# Altium PCB PCB print.PcbDoc
Units mil, origin at the board's own origin, x right, y up, seen from the top; angles counter-clockwise.
Board outline 3350 x 2755 mil, 2 copper layers (Top Layer, Bottom Layer); 22 components, 24 nets, 114 pads, 4 vias.
Unrouted connection lines stored in the file: 1.
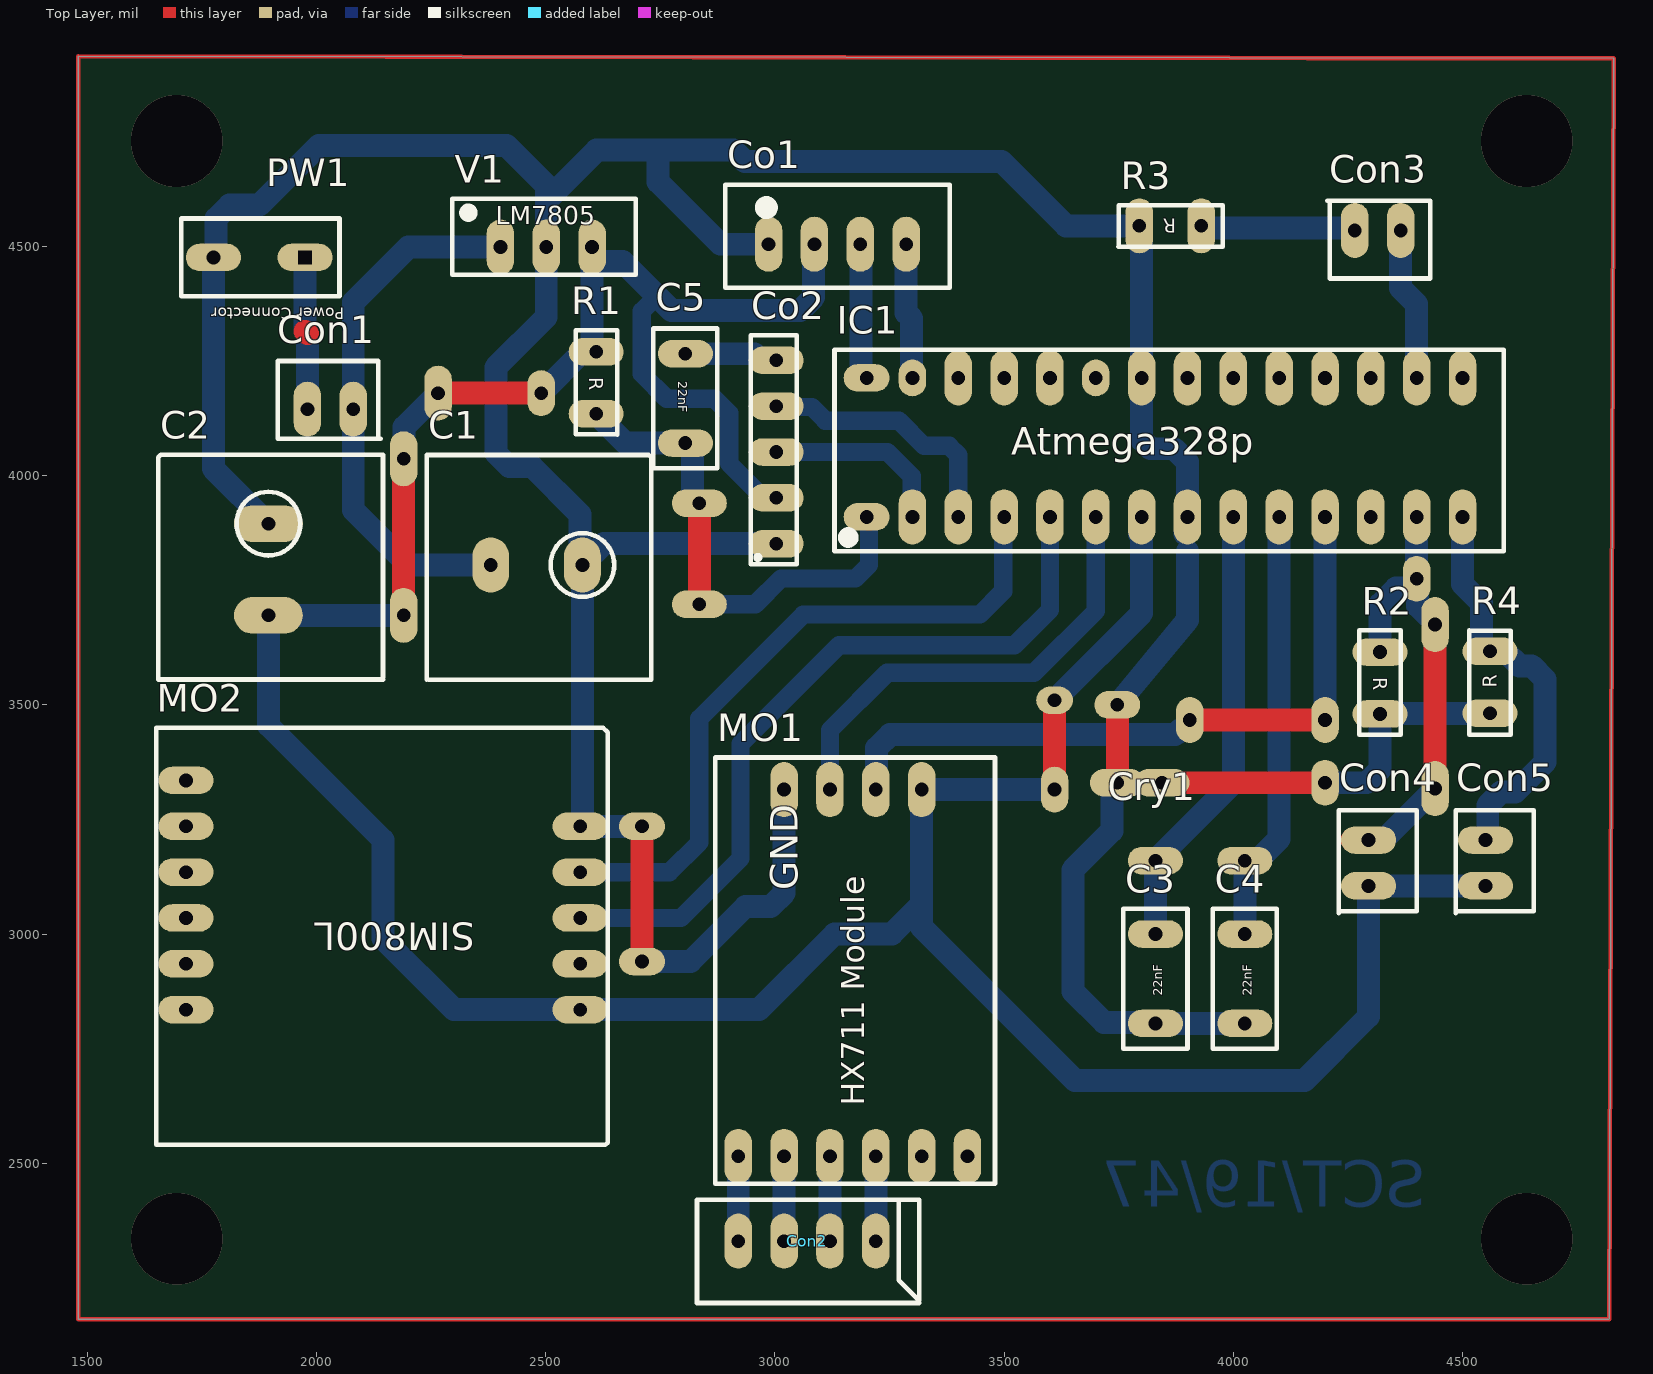
[diagram p0: Top Layer view]
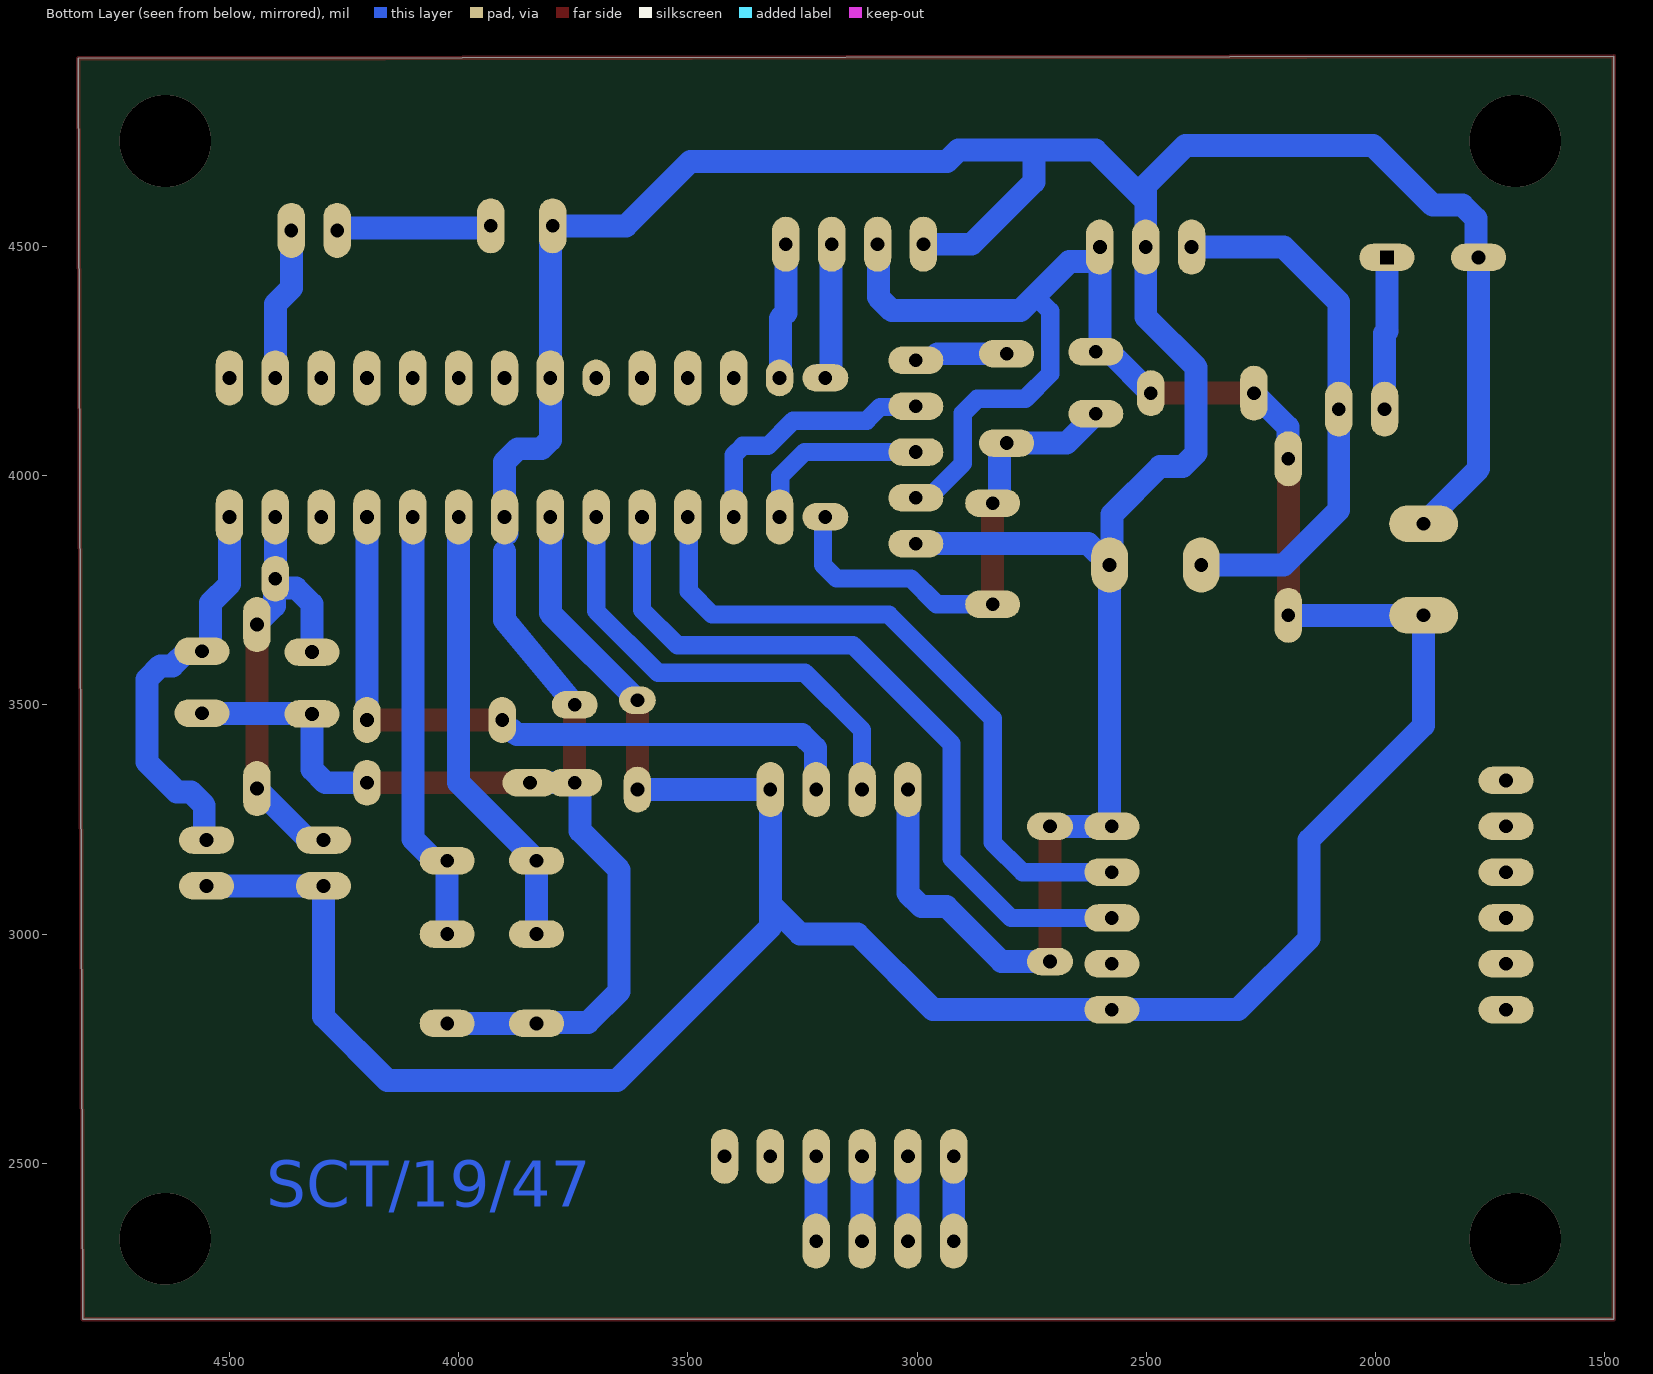
[diagram p1: Bottom Layer view, seen from below]
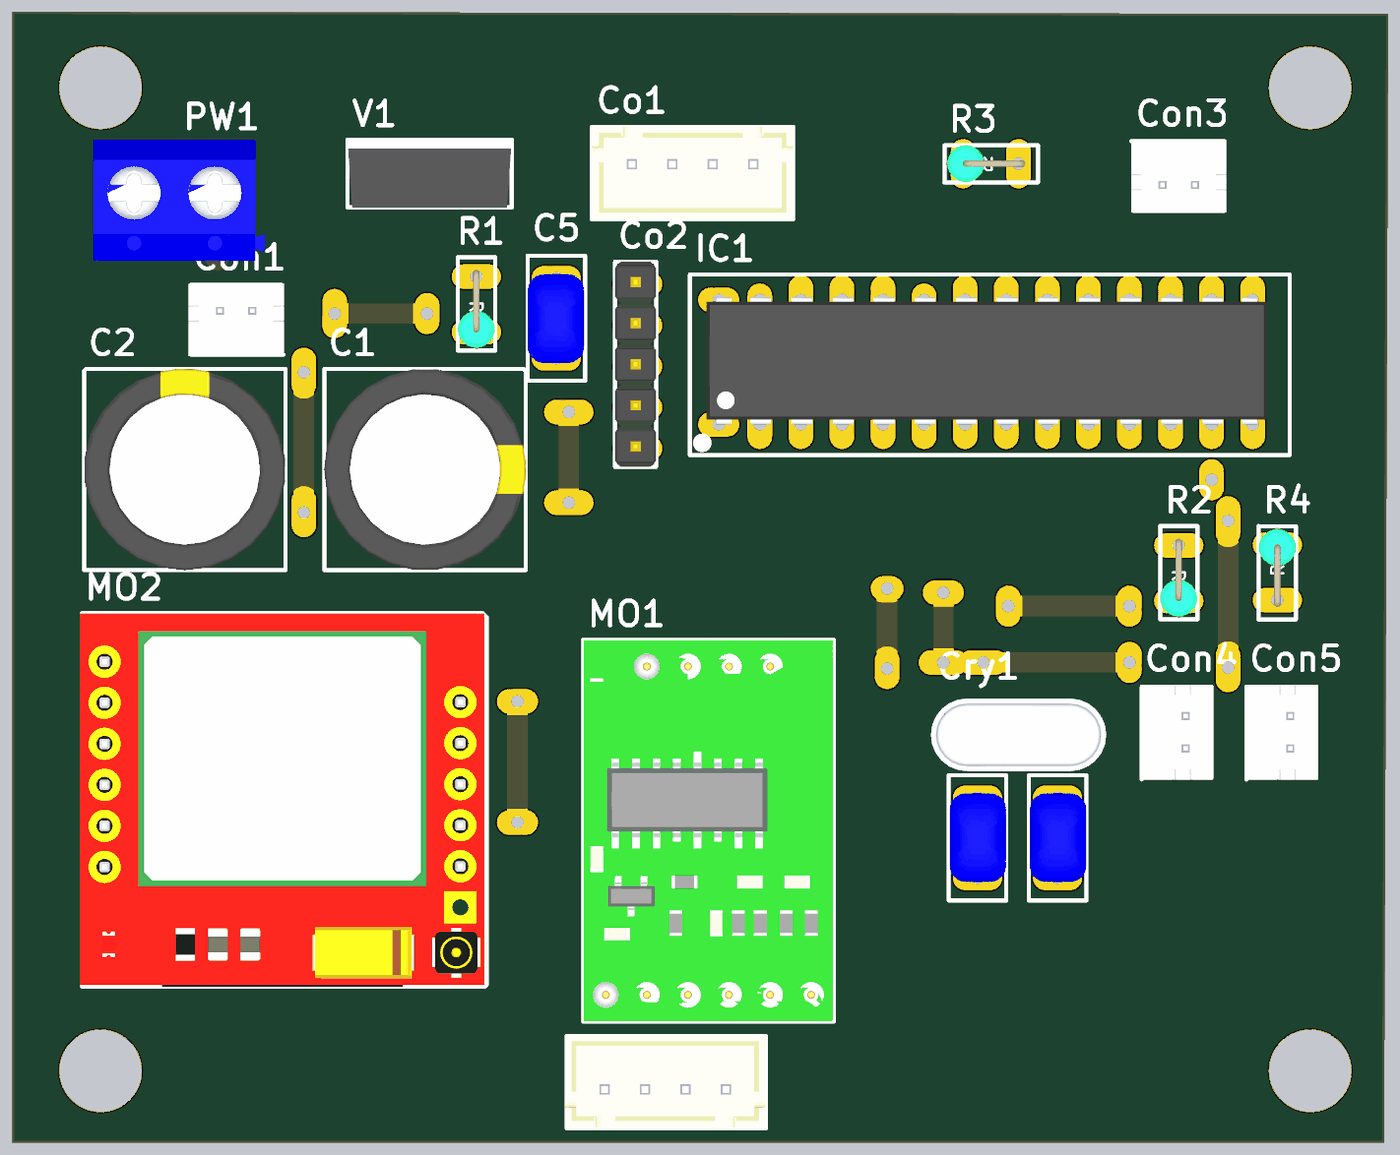
[diagram p2: 3D render of the assembled board from above, using the file's embedded part models]

## Layer stack, top to bottom
Top Solder: solder mask 0.4, Solder Resist, Dk 3.5
Top Layer: signal copper 1.4
Dielectric 1: dielectric 12.6, FR-4, Dk 4.8
Bottom Layer: signal copper 1.4
Bottom Solder: solder mask 0.4, Solder Resist, Dk 3.5

## Board outline
1480,2160 1480,4915 4830,4910 4820,2160

## Design rules (kind name [scope] priority, off if disabled: settings)
Clearance [All] p1: gap=10 ignorepadtopadclearanceinfootprint=FALSE except(0: Arc-Hole Track-Hole SMDPad-Hole THPad-Hole Via-Hole Fill-Hole Poly-Hole Region-Hole Text-Hole)
PolygonConnect [All] p1: connectstyle=Relief reliefconductorwidth=10 reliefentries=4 polygonreliefangle="90 Angle" airgapwidth=10
RoutingVias [All] p1: holewidth=28 width=50 viastyle="Through Hole" minholewidth=28 minwidth=50 maxholewidth=28 maxwidth=50
SolderMaskExpansion [All] p1: expansion=4
Width [All] p1: maxlimit=60 minlimit=30 preferedwidth=50 minimp=50.000000 maximp=50.000000 favimp=50.000000
30 further rules are at their usual default settings.

## Components (designator, comment, footprint, x,y, rotation, side; value= is the part's Value field where it differs from the comment)
C1 "100uF" "100uF Capacitor"#1 2380,3805 r0 top
C2 "100uF" "100uF Capacitor"#2 1895,3695.16 r90 top
C3 "22nF" "22nF capacitor" 3830,2805 r90 top
C4 "22nF" "22nF capacitor" 4025,2805 r90 top
C5 "100nF" "22nF capacitor" 2804.57,4265.93 r270 top
Co1 "OLED I2C connector" "oled connector i2c" 2986.17,4504.82 r0 top
Co2 "FTDI" FTDI 3002.65,3851.48 r90 top
Con1 "2 pin connector" "2 pin  connector" 2080,4145 r180 top
Con2 "4 pin connector" "4 pin connector" 3220,2330 r180 top
Con3 "indicator light" "2 pin  connector" 4265,4535 r0 top
Con4 "switch connector" "2 pin  connector" 4295,3105 r90 top
Con5 "switch connector" "2 pin  connector" 4550,3105 r90 top
Cry1 "16mhz" "16mhz crystal" 4025,3160 r180 top (schematic designator Cry?)
IC1 "Atmega328p" "Atmega328 TH" 3200,3910 r90 top
MO1 "HX711 Module" "HX711 MODULE" 2920,2515 r90 top
MO2 "SIM800l  GSM Module" "sim800l module" 2575,2835 r180 top
PW1 "Power_connector" Power_connector 1975,4475.95 r180 top
R1 "10k" "Resistor Vertical" 2610,4270 r270 top
R2 "10k" "Resistor Vertical" 4320,3615 r270 top
R3 "220" "Resistor Vertical" 3930,4545 r180 top
R4 "10k" "Resistor Vertical" 4560,3481.75 r90 top
V1 "LM7805CT" LM7805CT 2401.13,4498.59 r0 top

## Footprints (in the part's own frame and the unit in brackets; to place one, negate y for a bottom-side part, rotate by r counter-clockwise, add the part's x,y. Pads: shape width x height; smd on the part's side, far side on the other; paste and mask are expansions set on the pad)
"2 pin  connector" [mil]
  oval 60x120 hole 30: 1(0,0) 2(100,0)
  silkscreen extent -60,-105 165,65, body extent -61,-109 171,69, height 236
"4 pin connector" [mil]
  oval 60x120 hole 30: 1(0,0) 2(100,0) 3(200,0) 4(300,0)
  silkscreen extent -95,-90 390,135, body extent -94,-93 394,133, height 276
"16mhz crystal" [mil]
  oval 120x60 hole 30: 1(0,0) 2(195,0)
  body extent -119,-82 309,95, height 145
"22nF capacitor" [mil]
  oval 60x120 hole 30: 1(0,0) 2(195,0)
  silkscreen extent -55,-70 250,70, body extent -10,-70 207,68, height 218
"100uF Capacitor"#1 [mil]
  oval 80x120 hole 30: 1(0,0) 2(200,0)
  silkscreen extent -140,-250 350,240, body extent -141,-251 350,241, height 984
"100uF Capacitor"#2 [mil]
  oval 80x150 hole 30: 1(0,0) 2(200,0)
  silkscreen extent -140,-250 350,240, body extent -141,-251 350,241, height 984
"Atmega328 TH" [mil]
  oval 60x100 hole 30: 1(0,0) 28(303.14,0)
  oval 120x60 hole 30: 2(0,-100) 3(0,-200) 4(0,-300) 5(0,-400) 6(0,-500) 7(0,-600) 8(0,-700) 9(0,-800) 10(0,-900) 11(0,-1000) 12(0,-1100) 13(0,-1200) 14(0,-1300) 15(303.14,-1300) 16(303.14,-1200) 17(303.14,-1100) 18(303.14,-1000) 19(303.14,-900) 20(303.14,-800) 21(303.14,-700) 22(303.14,-600) 24(303.14,-400) 25(303.14,-300) 26(303.14,-200)
  oval 80x60 hole 30: 23(303.14,-500) 27(303.14,-100)
  silkscreen extent -75,-1390 365,70, body extent -1,-1335 311,30, height 180
FTDI [mil]
  oval 60x120 hole 30: 1(0,0) 2(100,0) 3(200,0) 4(300,0) 5(400,0)
  silkscreen extent -45,-45 455,55, body extent -45,-45 455,55, height 374
"HX711 MODULE" [mil]
  oval 120x60 hole 30: 1(0,0) 2(0,-100) 3(0,-200) 4(0,-300) 5(0,-400) 6(0,-500) 7(800,-100) 8(800,-200) 9(800,-300) 10(800,-400)
  silkscreen extent -60,-560 870,50, body extent -60,-558 870,48, height 409
LM7805CT [mil]
  oval 60x120 hole 30: 1(0,0) 2(100,0) 3(200,0)
  silkscreen extent -105,-60 295,105, body extent -105,-60 295,105, height 900
"oled connector i2c" [mil]
  oval 60x120 hole 30: 1(0,0) 2(100,0) 3(200,0) 4(300,0)
  silkscreen extent -95,-95 395,130, body extent -94,-95 394,131, height 276
Power_connector [mil]
  oval 120x60 hole 30 square: 1(0,0)
  oval 120x60 hole 30: 2(200,0)
  silkscreen extent -75,-85 270,85, body extent -120,-128 297,168, height 394
"Resistor Vertical" [mil]
  oval 60x120 hole 30: 1(0,0) 2(135,0)
  silkscreen extent -47,-45 181,46, body extent -17,-46 177,45, height 501
"sim800l module" [mil]
  oval 120x60 hole 30: 1(0,0) 2(0,-100) 3(0,-200) 4(0,-300) 5(0,-400) 6(860,-500) 7(860,-400) 8(860,-300) 9(860,-200) 10(860,-100) 11(860,0)
  silkscreen extent -60,-615 925,295, body extent -55,-615 929,295, height 238

## Part data
C1 C2: library part "100uF Capacitor"
C3 C4 C5: library part "22nF Capacitor"
Con3 Con4 Con5: library part "2 pin connector"
Cry1: library part "16mhz crystal"
R1 R2 R3 R4: library part "Resistor vertical"

## Free pads (board coordinates)
  oval 120x60 hole 30: 9(2835,3940) 10(2835,3719.29) 16(3844.29,3330) 18(3746.91,3330)
  oval 60x100 hole 30: 11(4200,3466.99) 12(3905,3466.99) 15(4200,3330) 20(3610,3315) 24(2489.92,4179.92) 27(4400,3775)
  oval 100x60 hole 30: 13(2710,3235) 14(2710,2940) 17(3746.91,3500)
  oval 80x60 hole 30: 19(3610,3510)
  oval 60x120 hole 30: 21(2190,3695.16) 22(2190,4036.74) 23(2265,4179.92) 28(4440,3675) 29(4440,3317.29)

## Via types
v1: diameter 200, hole 200, Top Layer to Bottom Layer, 4 vias

## Nets (pads, with @x,y where several pads share a name; then routed paths per layer and width w, separated by ;. In a path a pad name is that pad's centre, name@x,y a point inside that pad or via, vN(x,y) a via of type N, cw(c..) or ccw(c..) an arc to the next point about the centre after c; other vN are vias at no path point)
GND: C1.2 C2.2 C3.1 C4.1 Co1.1 Co2.1 IC1.8 IC1.22 MO1.7 MO2.5 pad.13 pad.14 pad.15 pad.16 pad.17 pad.18 PW1.2 R2.2 R3.2 R4.1 V1.2 | length 9463.7
  Top Layer w50: pad.14 pad.13 ; pad.18 pad.17 ; pad.16@3842.38,3331.91 pad.16 pad.15
  Bottom Layer w50: C2.2 1775,4015.16 PW1.2 1776.09,4475.95 1780.71,4480.57 1780.71,4560.71 1810,4590 1875,4590 2005,4720 2414.72,4720 2501.13,4633.59 2501.13,4600 ; MO2.5 MO2.5@2580,3235 ; C1.2@2605.74,3830.74 2626.48,3851.48 Co2.1 ; pad.14 2815.9,2940 2935.9,3060 2990.71,3060 3020,3089.29 MO1.7 ; pad.13 MO2.5@2580,3235 ; Co1.1 2881.17,4504.82 2745,4640.99 2745,4710 ; pad.17 3900,3685 3900,3835 ; pad.16 pad.18 3739.62,3330 3735,3325.38 3735,3225 3650,3140 3650,2875 3718.09,2806.91 3828.09,2806.91 C3.1 C4.1 C4.1@4026.91,2803.09 ; IC1.8@3895,3872.29 3900,3877.29 IC1.8 3900.38,3910.38 3900.38,4029.29 3871.09,4058.58 3819.56,4058.58 3800,4078.14 IC1.22 3800,4507.29 3795,4512.29 R3.2 3635,4545 3494.29,4685.71 2934.29,4685.71 2910,4710 2745,4710 ; pad.15 4290.71,3330 4320,3359.29 R2.2 4320.88,3480.88 4559.12,3480.88 R4.1 ; 2501.13,4600 V1.2 2501.13,4346.13 2391.13,4236.13 2391.13,4049.29 2420.42,4020 2470,4020 2574.26,3915.74 2574.26,3810.74 C1.2 MO2.5@2580,3235 ; 2501.13,4600 2611.13,4710 2745,4710
NetC1_1: C1.1 Con1.1 V1.1 | length 1174.1
  Bottom Layer w50: C1.1 2200,3805 2080,3925 Con1.1 2080,4378.59 2200,4498.59 V1.1
NetC2_1: C2.1 Co1.2 Co2.2 Con4.1 Con5.1 IC1.7 MO1.10 MO2.1 pad.19 pad.20 pad.21 pad.22 pad.23 pad.24 R1.1 V1.3 | length 7870.7
  Top Layer w50: pad.21 pad.22 pad.22@2190.75,4037.5 ; pad.23 pad.24 ; R1.1@2580,4270 R1.1 ; pad.20 pad.19
  Bottom Layer w40: 2742.42,4392.14 2709.57,4359.29 2709.57,4221.95 2763.86,4167.66 2868.51,4167.66 2900.03,4136.14 2900.03,4026.81 Co2.2@2975.36,3951.48
  Bottom Layer w50: pad.21 C2.1 1895,3455 2145,3205 2145,2990 2300,2835 MO2.1 2965,2835 3130,3000 3255,3000 3320,3065 ; pad.22 2190.75,4037.5 2190.75,4105.67 pad.23 ; pad.24 R1.1@2580,4270 ; V1.3 V1.3@2601.13,4471.29 ; R1.1 2605.75,4270 2601.13,4274.62 V1.3@2601.13,4471.29 ; Co2.2@2975.36,3951.48 Co2.2 Co2.2@3000.74,3953.39 ; Co1.2 3084.26,4502.91 3084.26,4389.29 3054.97,4360 2774.56,4360 2742.42,4392.14 2667.89,4466.67 2605.75,4466.67 V1.3@2601.13,4471.29 ; pad.20 MO1.10 3320,3065 ; pad.19 3800,3700 IC1.7@3800,3877.29 ; IC1.7@3795,3872.29 IC1.7@3800,3877.29 ; IC1.7@3801.91,3911.91 IC1.7 IC1.7@3800,3877.29 ; Con5.1 Con4.1 4295,2820 4155,2680 3655,2680 3320,3015 3320,3065
NetC3_2: C3.2 Cry1.2 IC1.9 | length 980.4
  Bottom Layer w50: C3.2 Cry1.2 4000,3330 IC1.9
NetC4_2: C4.2 Cry1.1 IC1.10 | length 957.1
  Bottom Layer w50: C4.2 Cry1.1 4052.29,3160 4100,3207.71 IC1.10
NetC5_1: C5.1 Co2.5 | length 207
  Bottom Layer w50: C5.1 2955.49,4265.93 2969.95,4251.48 Co2.5 Co2.5@3001.6,4252.53 ; C5.1@2806.48,4264.02 C5.1@2807.53,4262.97
NetC5_2: C5.2 IC1.1 pad.9 pad.10 R1.2 | length 1148.8
  Top Layer w50: pad.10 pad.9 ; IC1.1 3200.38,3910 IC1.1@3205,3905.38
  Bottom Layer w40: pad.10 2956.94,3719.29 3013.36,3775.71 3175.71,3775.71 3205,3805 IC1.1@3205,3905.38
  Bottom Layer w50: R1.2@2640,4135 R1.2 2674.07,4070.93 C5.2 2815.16,4070.93 2819.78,4066.31 2819.78,3944.62 2824.4,3940 pad.9 ; IC1.1@3193.71,3905.38 3198.33,3910 IC1.1
NetCo1_3: Co1.3 IC1.28 | length 324.4
  Bottom Layer w50: Co1.3@3184.26,4502.91 Co1.3 3188.09,4502.91 3188.09,4217.76 3192.71,4213.14 IC1.28 3213.47,4213.14 IC1.28@3218.09,4217.76
NetCo1_4: Co1.4 IC1.27 | length 297.4
  Bottom Layer w50: Co1.4 3286.17,4355 3298.09,4343.09 3298.09,4215.05 IC1.27
NetCo2_3: Co2.3 IC1.2 | length 406.9
  Bottom Layer w40: Co2.3 3245.43,4051.48 3298.09,3998.83 IC1.2@3298.09,3911.91
  Bottom Layer w50: IC1.2@3298.09,3911.91 IC1.2
NetCo2_4: Co2.4 IC1.3 | length 579.2
  Bottom Layer w40: Co2.4@3004.57,4149.57 3080.43,4149.57 3110,4120 3270,4120 3325,4065 3380,4065 3400,4045 IC1.3
  Bottom Layer w50: Co2.4@3004.57,4149.57 Co2.4 Co2.4@3004.57,4153.39
NetCon1_2: Con1.2 PW1.1 | length 333
  Top Layer w50: 1975,4315 1980,4310
  Bottom Layer w50: 1975,4315 PW1.1 ; Con1.2 1980,4310
NetCon2_1: Con2.1 MO1.4 | length 185
  Bottom Layer w50: Con2.1 MO1.4
NetCon2_2: Con2.2 MO1.3 | length 185
  Bottom Layer w50: Con2.2 MO1.3
NetCon2_3: Con2.3 MO1.2 | length 185
  Bottom Layer w50: Con2.3 MO1.2
NetCon2_4: Con2.4 MO1.1 | length 185
  Bottom Layer w50: Con2.4 MO1.1
NetCon3_1: Con3.1 R3.1 | length 339.6
  Bottom Layer w50: R3.1 3930,4544.62 3934.62,4540 4260.38,4540 4265,4535.38 Con3.1
NetCon3_2: Con3.2 IC1.16 | length 336.4
  Bottom Layer w50: Con3.2 4365,4409 4400,4374 IC1.16
NetCon4_2: Con4.2 IC1.13 pad.27 pad.28 pad.29 R2.1 | length 1161.3
  Top Layer w50: Con4.2@4259,3205 Con4.2 Con4.2@4327.71,3205 ; R2.1 R2.1@4348.58,3615 ; pad.27@4400,3752.29 pad.27 ; pad.29 pad.28
  Bottom Layer w50: Con4.2 4327.71,3205 pad.29 ; R2.1@4350,3615 R2.1 4320,3720 4355,3755 4380,3755 pad.27 ; IC1.13@4401.91,3908.09 IC1.13 pad.27 ; pad.28 4440,3677.71 4401.91,3715.79 4401.91,3773.09 pad.27
NetCon5_2: Con5.2 IC1.14 R4.2 | length 894.7
  Bottom Layer w50: IC1.14@4499.66,3909.66 IC1.14 4500,3763.37 4541.62,3721.75 4541.62,3621.37 4546.24,3616.75 R4.2 4592.71,3616.75 4624.46,3585 4650.71,3585 4680,3555.71 4680,3375 4615,3310 4584.29,3310 4555,3280.71 4555,3209.62 4550.38,3205 Con5.2
NetIC1_4: IC1.4 MO2.4 | length 1497.9
  Top Layer w50: IC1.4@3498.09,3908.09 IC1.4
  Bottom Layer w40: MO2.4 2770,3135 2835,3200 2835,3470 3062,3697 3447,3697 3498.09,3748.09 IC1.4@3498.09,3908.09
NetIC1_5: IC1.5 MO2.3 | length 1652.7
  Bottom Layer w40: MO2.3 2795,3035 2925,3165 2925,3415 3140,3630 3522.75,3630 3600,3707.25 IC1.5
NetIC1_6: IC1.6 MO1.8 | length 1022.7
  Bottom Layer w40: MO1.8 3120,3445 3245,3570 3565,3570 3700,3705 IC1.6
NetIC1_11: IC1.11 MO1.9 pad.11 pad.12 | length 1550.8
  Top Layer w50: MO1.9 MO1.9@3221.91,3316.91 ; pad.12 pad.11
  Bottom Layer w50: MO1.9 3221.91,3316.91 3221.91,3405.71 3251.2,3435 3873.01,3435 3883.09,3445.08 3900.38,3445.08 3905,3449.69 pad.12 ; pad.11 IC1.11
pads on no net: IC1.12 IC1.15 IC1.17 IC1.18 IC1.19 IC1.20 IC1.21 IC1.23 IC1.24 IC1.25 IC1.26 MO1.5 MO1.6 MO2.2 MO2.6 MO2.7 MO2.8 MO2.9 MO2.10 MO2.11
copper on no net: | length 12195
  Top Layer w10: 1480,2160 1480,4915 4830,4910 4820,2160 1480,2160
  other v1: 1695,2335 4640,2335 1695,4730 4640,4730

## Other copper
Bottom Layer:
  text "SCT/19/47" at 4420,2405 h100

## Text inside footprints (layer, text, board x,y; h text height)
C5: Top Overlay "22nF" at 2789.57,4205.93 h20 r270
MO1: Top Overlay "GND" at 3050,3095 h60 r90
MO2: Top Overlay "SIM800L" at 2345,3025 h60 r180
PW1: Top Overlay "Power Connector" at 2060,4365.95 h25 r180
R1: Top Overlay "R" at 2595,4215 h30 r270
R2: Top Overlay "R" at 4305,3560 h30 r270
R3: Top Overlay "R" at 3875,4560 h30 r180
R4: Top Overlay "R" at 4575,3536.75 h30 r90
V1: Top Overlay "LM7805" at 2391.13,4548.59 h40